# EAGLE board 2TinyISD1700_V2_2020-08-10-smd-sop.brd2 (EAGLE 7.5.0)
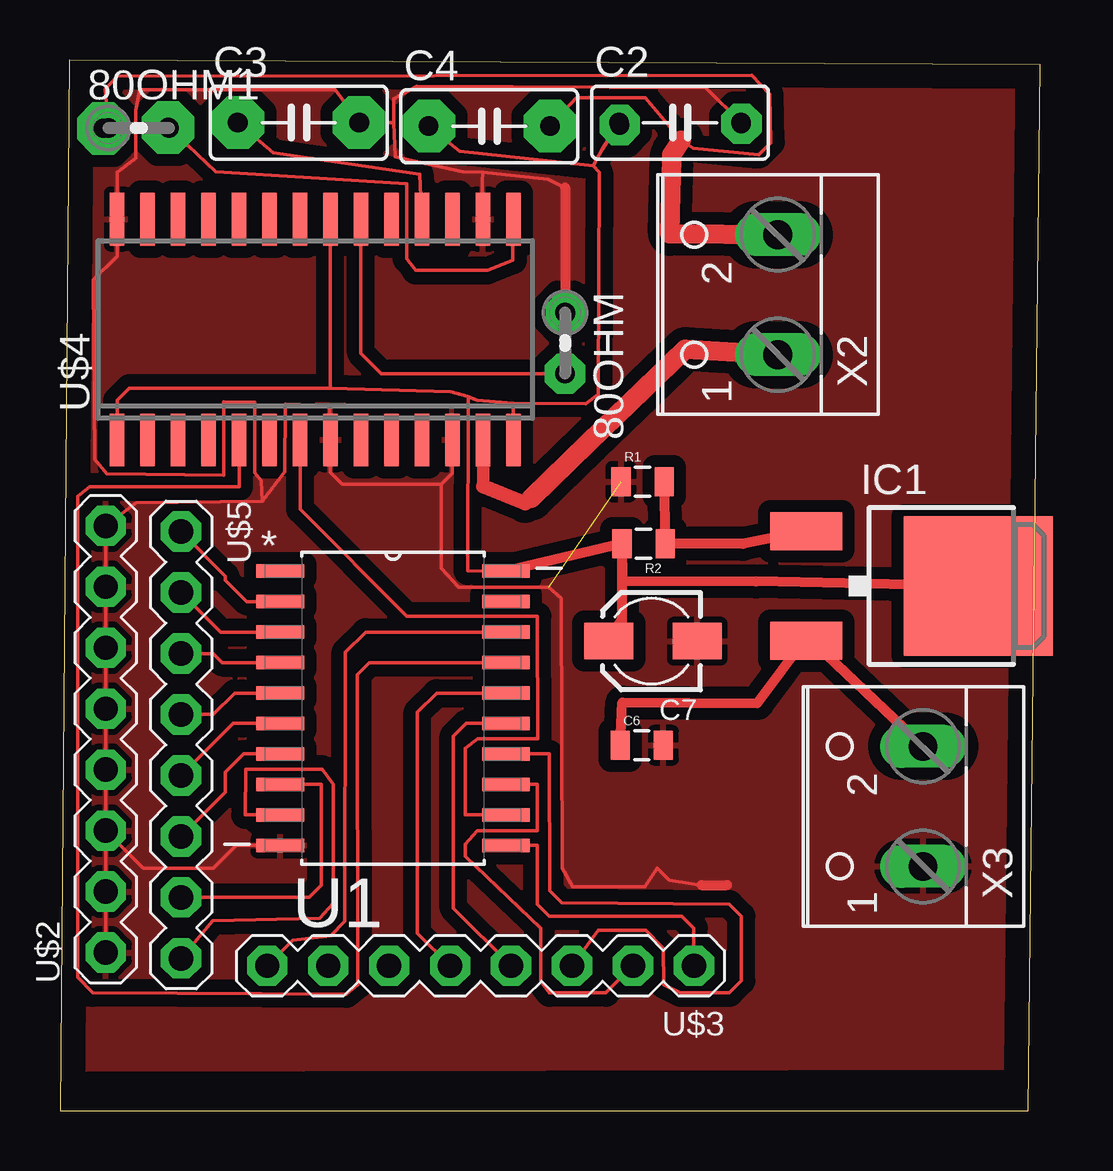
[diagram p0: board, top side]

Size 40.84 x 43.78 mm. Coordinates in mm from the lower left corner, seen from the top.
Outline: 0,0.01 40.34,0 40.84,43.59 0.4,43.78 0,0.01
Copper layers (1*16): Top 0.035mm / dielectric 1.5mm / Bottom 0.035mm
Design rules "default *": minimum track width 10mil, minimum drill 24mil, track to track 20mil, track to pad 20mil, pad to pad 20mil, via to via 20mil, smd to smd 8mil, copper to edge 40mil, drill to drill 8mil, minimum pad ring 10mil, minimum via ring 8mil, stop-mask expansion 4mil, vias tented up to drill 0mil, thermal gap 10mil

## Footprints (pad centres in the part's own frame; a part is rotated, then mirrored left to right if it is on the bottom)
0204V = drill 0.813 octagon: 1 -1.27,0; 2 1.27,0
C050-030X075 = drill 0.813 octagon: 1 -2.54,0; 2 2.54,0
0805 = smd 0.8 x 1.2: 1 -0.9,0; 2 0.9,0
ELECTRO-SMD-A-3.8MM = smd 2.032 x 1.524: + 1.778,0; - -1.905,0
DPACK = smd 1.6 x 3: 1 -2.28,-4.8; 3 2.28,-4.8 | smd 5.8 x 6.2: 4 0,2.38
SOIC127P1032X265-20N = smd 1.981 x 0.559: 1 -4.699,5.715; 2 -4.699,4.445; 3 -4.699,3.175; 4 -4.699,1.905; 5 -4.699,0.635; 6 -4.699,-0.635; 7 -4.699,-1.905; 8 -4.699,-3.175; 9 -4.699,-4.445; 10 -4.699,-5.715; 11 4.699,-5.715; 12 4.699,-4.445; 13 4.699,-3.175; 14 4.699,-1.905; 15 4.699,-0.635; 16 4.699,0.635; 17 4.699,1.905; 18 4.699,3.175; 19 4.699,4.445; 20 4.699,5.715
8PIN_HEADER = drill 1.016 pad 1.676 octagon: P$1 0,0; P$2 2.54,0; P$3 5.08,0; P$4 7.62,0; P$5 10.16,0; P$6 12.7,0; P$7 15.24,0; P$8 17.78,0
SO28W = smd 0.6 x 2.2: 1 -8.255,-4.6; 2 -6.985,-4.6; 3 -5.715,-4.6; 4 -4.445,-4.6; 5 -3.175,-4.6; 6 -1.905,-4.6; 7 -0.635,-4.6; 8 0.635,-4.6; 9 1.905,-4.6; 10 3.175,-4.6; 11 4.445,-4.6; 12 5.715,-4.6; 13 6.985,-4.6; 14 8.255,-4.6; 15 8.255,4.6; 16 6.985,4.6; 17 5.715,4.6; 18 4.445,4.6; 19 3.175,4.6; 20 1.905,4.6; 21 0.635,4.6; 22 -0.635,4.6; 23 -1.905,4.6; 24 -3.175,4.6; 25 -4.445,4.6; 26 -5.715,4.6; 27 -6.985,4.6; 28 -8.255,4.6
W237-102 = drill 1.194 long: 1 -2.5,-1.27; 2 2.5,-1.27

## Placement (x,y rotation side)
80OHM  [0204V]  21.05,31.98 270 top
80OHM1  10Kohm  [0204V]  3.28,40.95 0 top
C2  [C050-030X075]  25.84,41.17 0 top
C3  [C050-030X075]  9.95,41.17 0 top
C4  [C050-030X075]  17.89,41.02 0 top
C6  [0805]  24.24,15.23 0 top
C7  10UF 16V  [ELECTRO-SMD-A-3.8MM]  24.65,19.57 180 top
IC1  LM317MDT  [DPACK]  35.88,21.87 270 top
R1  [0805]  24.28,26.21 0 top
R2  [0805]  24.32,23.63 180 top
U1  ATTINY4313-SU  [SOIC127P1032X265-20N]  13.88,16.77 0 top
U$2  8PIN_HEADER  [8PIN_HEADER]  1.91,6.59 90 top
U$3  8PIN_HEADER  [8PIN_HEADER]  26.42,6.04 180 top
U$4  ISD1700SY  [SO28W]  10.64,32.55 0 top
U$5  8PIN_HEADER  [8PIN_HEADER]  5.05,24.13 270 top
X2  [W237-102]  28.64,34 90 top
X3  [W237-102]  34.69,12.68 90 top

## Library data of the parts
80OHM 80OHM1 = rcl; OC_FARNELL: unknown
C2-C4 = resistor; OC_FARNELL: unknown
C6 R1 R2 = SparkFun2
C7 = Seeed-OPL-Capacitor
IC1 = v-reg
U1 = Atmel_By_element14_Batch_1-00; MF: MICROCHIP; MPN: ATTINY4313-SU; OC_FARNELL: 1841621; OC_NEWARK: 12T1340; PACKAGE: SOIC-20; SUPPLIER: Atmel
U$2 U$3 U$5 = arduino; MF: RENESAS; MPN: YSDKS128E10; OC_FARNELL: 2946736
U$4 = isd-new-1; OC_FARNELL: unknown
X2 X3 = con-wago-500; OC_FARNELL: unknown; OC_NEWARK: 70K9898

## Nets
5V: C6.1 IC1.3 X3.2
CSK: U1.19
GND: 80OHM.1 C2.2 C3.2 C6.2 C7.- R1.1 U1.10 U$2.P$1 U$2.P$2 U$2.P$3 U$2.P$4 U$2.P$5 U$2.P$6 U$2.P$7 U$2.P$8 U$4.8 U$4.12 U$4.16 U$4.28 X3.1
MOSI: U1.17 U$4.5
N$1: 80OHM.2 U$4.20
N$2: U1.13 U$3.P$2
N$3: U1.14 U$3.P$3
N$4: 80OHM1.1 C4.2 X2.2
N$5: C3.1 U$4.18
N$6: U$4.13 X2.1
N$7: 80OHM1.2 U$4.15
N$8: U1.15 U$3.P$4
N$9: U1.11 U$3.P$1
N$11: U1.9 U$5.P$8
N$12: U1.8 U$5.P$7
N$13: U1.7 U$5.P$6
N$14: U1.6 U$5.P$5
N$15: U1.3 U$5.P$2
N$16: U1.2 U$5.P$1
N$20: U1.16 U$3.P$5
N$29: IC1.1 R1.2 R2.1
PA0: U1.5 U$5.P$4
PA1: U1.4 U$5.P$3
Q: U1.18 U$3.P$8
SS: U1.12 U$4.7
VCC: C2.1 C4.1 C7.+ IC1.4 R2.2 U1.20 U$4.1 U$4.14 U$4.21

## Tracks (layer width: path | path; a pad name or v marks a point on that pad's centre or on a via)
5V
  Top 0.406: C6.1 23.44,17.02 29.06,16.99 31.13,19.77 | 31.13,19.77 IC1.3 | X3.2 31.13,19.77
GND  (1 unrouted)
  Top 0.152: 8.43,25.39 8.4,26.26 8.11,26.58 8.12,29.52 6.83,29.54 6.82,26.48 1.95,26.54 1.45,27.15 1.4,34.63 2.38,35.61 U$4.28 2.38,39.1 3.15,39.68 3.17,41.68 3.32,42.55 11.47,42.55 C3.2 13.9,41.16 | 17.62,39.11 20.31,38.81 21.05,38.46 | 17.62,39.11 16.79,39.14 14.89,39.55 13.96,39.75 13.9,41.16 | 15.9,26.11 11.77,26.11 11.27,26.61 U$4.8 11.25,29.38 9.38,29.44 9.37,26.62 8.43,25.39 | U$2.P$3 3.47,10.11 6.4,10.11 7.34,11.06 U1.10 | 26.72,9.4 25.4,9.61 24.9,10.11 24.36,9.33 21.36,9.33 20.93,10.11 20.9,21.35 20.36,21.82 16.62,21.82 15.9,22.61 15.9,26.11 | 13.9,41.16 13.91,42.16 14.87,42.7 26.91,42.62 C2.2 | 15.9,26.11 16.35,26.57 U$4.12 | 17.62,39.11 17.6,38.72 17.6,38.45 17.6,38.41 U$4.16 | U$2.P$3 U$2.P$2 U$2.P$1 | U$2.P$3 U$2.P$4 U$2.P$5 U$2.P$6 U$2.P$7 U$2.P$8 3.18,25.34 8.43,25.39
  Top 0.406: 26.72,9.4 27.79,9.4 | 21.05,38.46 80OHM.1
  pour Top: 0.4,43.61 40.94,43.67 40.37,1.77 0.12,1.69 0.15,5.06
MOSI
  Top 0.152: U1.17 12.9,18.68 12.4,18.18 12.41,5.25 11.93,4.86 1.36,4.91 0.73,5.57 0.73,25.61 1.23,26 7.46,26 U$4.5
N$1
  Top 0.152: 80OHM.2 13.4,30.71 12.54,31.57 U$4.20
N$2
  Top 0.152: U$3.P$2 22.74,4.91 20.4,4.91 20.04,5.39 20.04,7.6 16.9,10.61 16.9,11.11 17.39,11.66 19.89,11.66 19.9,13.6 U1.13
N$3
  Top 0.152: U$3.P$3 22.42,7.52 24.41,7.52 25.14,6.78 25.15,5.26 25.85,4.91 27.9,4.91 28.4,5.41 28.4,8.11 27.9,8.61 20.91,8.67 20.41,9.17 20.4,14.87 U1.14
N$4
  Top 0.152: 80OHM1.1 1.88,42.56 2.4,43.11 28.82,43.16 29.56,42.35 29.62,40.34 29.12,39.84 26.4,40.11 25.89,40.44 24.4,42.2 21.52,42.2 C4.2
  Top 0.813: X2.2 25.41,36.54 25.42,37.43 25.49,39.69 25.49,39.71 25.49,39.83 25.89,40.44
N$5
  Top 0.152: C3.1 8.89,39.91 14.98,39.02 U$4.18
N$6
  Top 0.513: 17.63,26.02 U$4.13
  Top 0.6: 19.38,25.31 17.63,26.02
  Top 0.613: 19.64,25.52 19.38,25.31
  Top 0.813: X2.1 26.05,31.73 22.02,27.82 19.64,25.52
N$7
  Top 0.152: 80OHM1.2 6.49,39.13 14.45,38.62 14.45,35.49 14.81,35.02 17.81,35.02 18.87,35.44 U$4.15
N$8
  Top 0.152: U$3.P$4 16.4,8.44 16.4,15.61 16.92,16.14 U1.15
N$9
  Top 0.152: U$3.P$1 26.42,7.61 25.92,8.11 20.4,8.11 19.9,8.61 19.9,11.06 U1.11
N$10  (via drill 0.8 pad 2.18)
  other vias: 1.8,40.93
N$11
  Top 0.152: U$5.P$8 6.36,7.92 10.83,8.02 11.4,8.64 11.4,13.61 10.92,14.24 7.73,14.24 7.71,12.33 U1.9
N$12
  Top 0.152: U$5.P$7 10.4,8.89 10.9,9.39 10.9,13.6 U1.8
N$13
  Top 0.152: U$5.P$6 6.9,13.28 6.9,14.11 7.65,14.87 U1.7
N$14
  Top 0.152: U$5.P$5 7.21,16.14 U1.6
N$15
  Top 0.152: U$5.P$2 6.69,19.95 U1.3
N$16
  Top 0.152: U$5.P$1 6.9,22.28 6.9,22.11 7.79,21.22 U1.2
N$17  (via drill 0.8 pad 2.18)
  other vias: 4.51,40.97
N$18  (via drill 0.8 pad 2.18)
  other vias: 7.42,41.17
N$19  (via drill 0.8 pad 2.18)
  other vias: 12.45,41.17
N$20
  Top 0.152: U$3.P$5 14.9,7.4 14.9,16.61 15.69,17.41 U1.16
N$21  (via drill 0.8 pad 2.18)
  other vias: 15.37,41.03
N$22  (via drill 0.8 pad 2.18)
  other vias: 20.42,41.02
N$23  (via drill 0.8 pad 1.68)
  other vias: 23.32,41.07
N$24  (via drill 0.8 pad 1.68)
  other vias: 28.39,41.12
N$25  (via drill 0.8 pad 1.68)
  other vias: 21.07,33.24
N$26  (via drill 0.8 pad 1.68)
  other vias: 21.04,30.71
N$29
  Top 0.406: R1.2 25.24,23.75 R2.1 28.46,23.62 IC1.1
PA0
  Top 0.152: U$5.P$4 6.4,16.51 7.29,17.41 U1.5
PA1
  Top 0.152: U$5.P$3 6.4,19.05 6.77,18.68 U1.4
Q
  Top 0.152: U$3.P$8 9.71,7.11 11.29,7.3 11.87,7.89 11.9,19.11 12.73,19.95 U1.18
SS
  Top 0.152: U1.12 16.9,12.33 16.9,15.11 17.41,15.51 19.91,15.51 19.9,20.61 14.45,20.61 10,25.06 U$4.7
VCC
  Top 0.152: 22.21,39.38 22.46,39.1 22.43,29.86 21.91,29.46 18.88,29.49 | 18.88,29.49 U$4.14 | 11.27,30.11 2.9,30.11 2.38,29.6 U$4.1 | U1.20 16.98,22.5 17,29.74 | 17,29.74 16.96,29.77 16.28,29.97 11.27,30.11 | 22.21,39.38 16.66,39.97 C4.1 | 22.21,39.38 22.59,40.07 C2.1 | 11.27,30.11 U$4.21 | 17,29.74 17.4,29.61 18.88,29.49
  Top 0.406: R2.2 23.4,20.44 | 23.4,20.44 23.4,20.24 | C7.+ 23.4,20.44 | R2.2 U1.20 | R2.2 23.42,22.09 29,22.05 IC1.4